# EAGLE board SerLCD_20x4_PF-v01 (EAGLE 7.6.0)

Size 101.6 x 124.46 mm. Coordinates in mm from the lower left corner, seen from the top.
Outline: 2.54,0 arc-90 0,2.54 0,121.92 arc-90 2.54,124.46 99.06,124.46 arc-90 101.6,121.92 101.6,2.54 arc-90 99.06,0 2.54,0
Outline: 86.36,111 22.86,111 22.86,109.22 24.38,109.22 24.38,13.97 22.86,13.97 22.86,12.19 86.36,12.19 86.36,13.97 85.6,13.97 85.6,109.22 86.36,109.22 86.36,111
Copper layers (1*16): Top 0.035mm / dielectric 1.5mm / Bottom 0.035mm
Design rules "SparkFun-2-layer-TIGHT *": minimum track width 10mil, minimum drill 15mil, track to track 7mil, track to pad 7mil, pad to pad 7mil, via to via 7mil, smd to smd 7mil, copper to edge 7mil, drill to drill 7mil, minimum pad ring 7mil, minimum via ring 7mil, stop-mask expansion 4mil, vias tented up to drill 25mil, thermal gap 10mil
Net classes: 1 vcc1: width 0.203 mm; 3 VCC2: width 0.381 mm, drill 0.508 mm, clearance 0.254 mm to class 0; 8 eight_mil: width 0.203 mm, clearance 0.127 mm; 9 twelve_mil: width 0.305 mm, clearance 0.127 mm; 10 twenty_mil: width 0.508 mm, clearance 0.127 mm; 11 thirty_mil: width 0.762 mm, clearance 0.127 mm; 13 20_mil: width 0.508 mm, drill 0.508 mm

## Footprints (pad centres in the part's own frame; a part is rotated, then mirrored left to right if it is on the bottom)
STAND-OFF-TIGHT = hole 3.048: 0,0
GOLD_HINGE_PM = hole 6.35: 14.224,4.051; 14.224,15.197 | hole 2.794: 3.81,4.077; 3.81,15.07

## Placement (x,y rotation side)
U$1  [SER_LCD_20X4_REF_ONLY]  85.09,12.7 90 top
U$3  [STAND-OFF-TIGHT]  97.79,120.65 0 top
U$6  GOLD_HINDGEPM+PF  [GOLD_HINGE_PM]  0,105.41 0 top
U$7  GOLD_HINDGEPM+PF  [GOLD_HINGE_PM]  0,0 0 top
U$8  [STAND-OFF-TIGHT]  97.79,3.81 0 top

## Library data of the parts
U$1 = SerLCD_dimensions
U$3 U$8 = SparkFun
U$6 U$7 = Testing

## Text on the board
Bottom: v01 (11/15/2016) Plewis
Dimension: ROUTE OUT | ROUTE OUT | ROUTE OUT
tPlace: PF | Serial LCD 20x4 | #580